# Altium PCB PCB1.PcbDoc
Units mil, origin at the board's own origin, x right, y up, seen from the top; angles counter-clockwise.
Board outline 6000 x 4000 mil, 2 copper layers (Top Layer, Bottom Layer); 10 components, 8 nets, 39 pads, 12 vias.
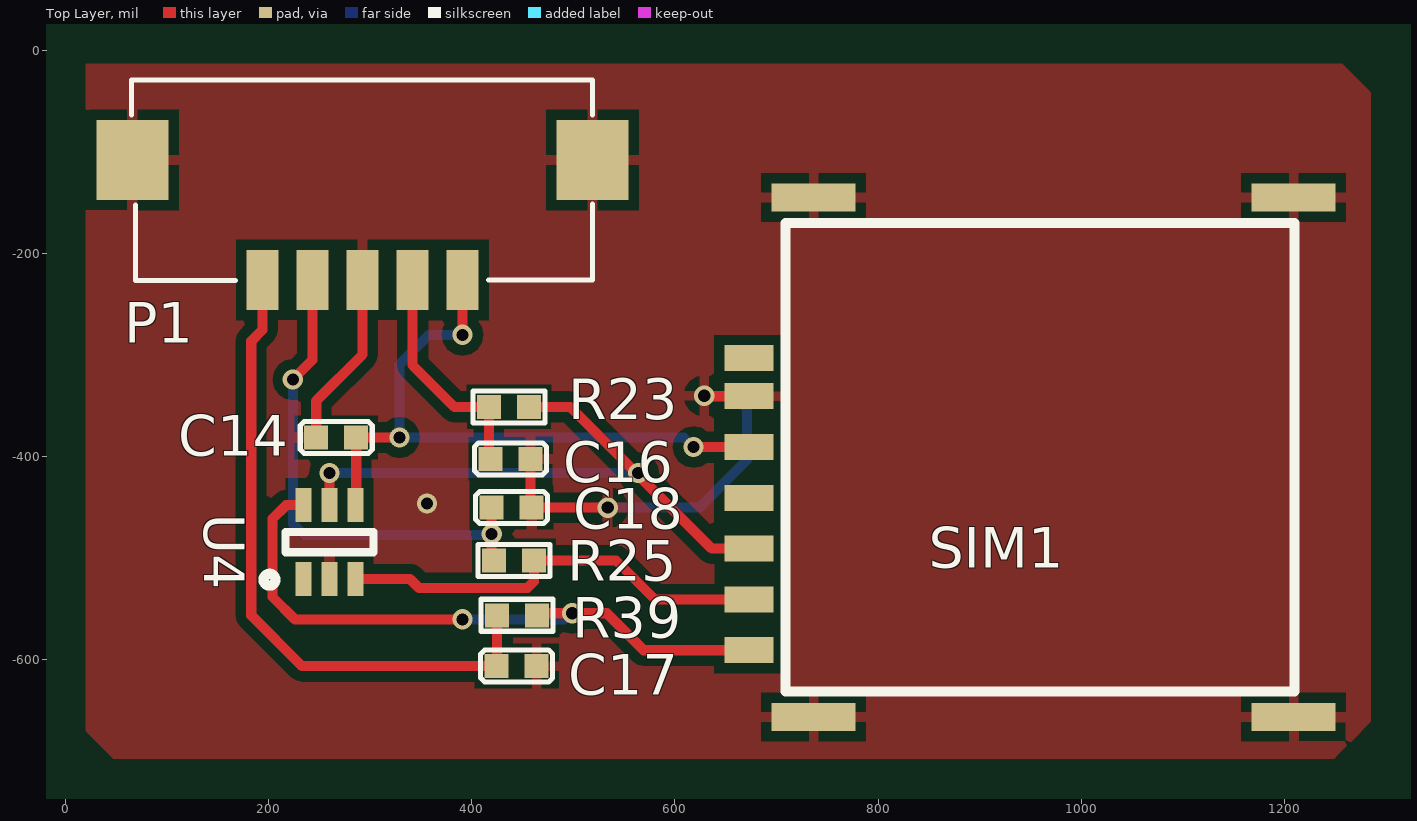
[diagram p0: Top Layer view]
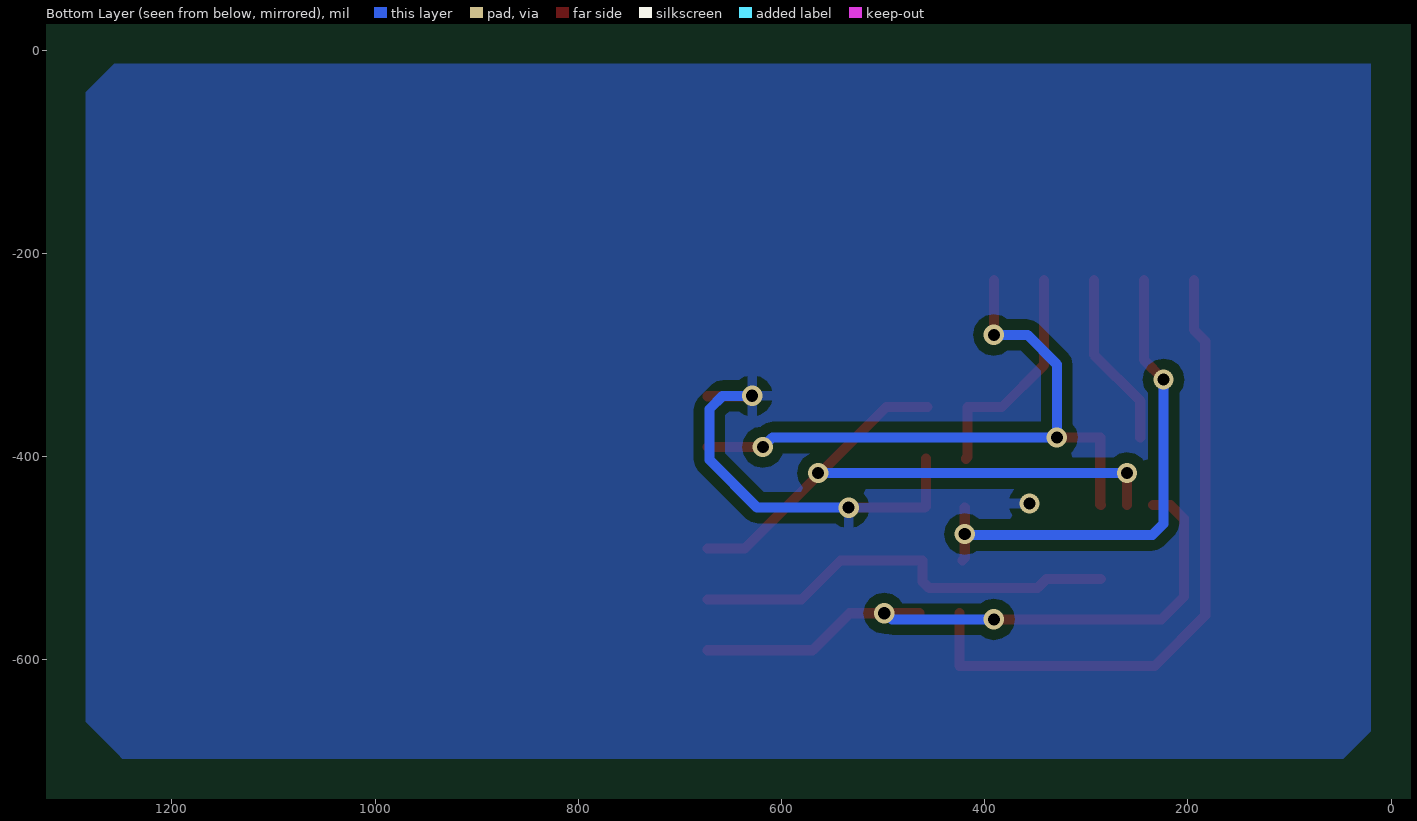
[diagram p1: Bottom Layer view, seen from below]

## Layer stack, top to bottom
Top Layer: signal copper 1.4
Dielectric: dielectric 12.6, FR-4, Dk 4.8
Bottom Layer: signal copper 1.4

## Board outline
-2327,-2683 3673,-2683 3673,1317 -2327,1317

## Design rules (kind name [scope] priority, off if disabled: settings)
Clearance [All] p1: gap=10
PolygonConnect [All] p1: connectstyle=Relief reliefconductorwidth=10 reliefentries=4 polygonreliefangle="90 Angle"
RoutingVias [All] p1: holewidth=28 width=50 viastyle="Through Hole" minholewidth=28 minwidth=50 maxholewidth=28 maxwidth=50
SilkscreenOverComponentPads [All] p1: minsilkscreentomaskgap=10
SolderMaskExpansion [All] p1: expansion=4
Width [All] p1: maxlimit=10 minlimit=10 preferedwidth=10
27 further rules are at their usual default settings.

## Components (designator, comment, footprint, x,y, rotation, side; value= is the part's Value field where it differs from the comment)
C14 "0.1uF" 0402C 247,-381 r0 top
C16 "10pF/NC" 0402C 458,-402 r180 top
C17 "10pF/NC" 0402C 464,-606 r180 top
C18 "10pF/NC" 0402C 459,-450 r180 top
P1 "Header 5" 5×1.25mmSMT 391,-226 r180 top
R23 "10R" 0402R 417,-351 r0 top
R25 "10R" 0402R 422,-502 r0 top
R39 "10R" 0402R 425,-556 r0 top
SIM1 "microsim" "Nano SIM" 673,-303 r90 top
U4 "SMF05C_1" SC70-6L 260,-484 r90 top

## Footprints (in the part's own frame and the unit in brackets; to place one, negate y for a bottom-side part, rotate by r counter-clockwise, add the part's x,y. Pads: shape width x height; smd on the part's side, far side on the other; paste and mask are expansions set on the pad)
5×1.25mmSMT [mm]
  rect 1.8x2 smd: 0(-3.25,-3) 0(8.25,-3)
  rect 0.8x1.5 smd: 1(0,0) 2(1.25,0) 3(2.5,0) 4(3.75,0) 5(5,0)
  round 0.5 on Top Overlay: ""(-0.875,0.432)
  silkscreen extent -3.25,-5 8.28,0.02
0402C [mm]
  rect 0.6x0.6 smd: 1(0,0) 2(1,0)
  silkscreen extent -0.4,-0.4 1.4,0.4
0402R [mm]
  rect 0.6x0.6 smd: 1(0,0) 2(1,0)
  silkscreen extent -0.4,-0.4 1.4,0.4
"Nano SIM" [mm]
  rect 0.7x2.1 smd: 0(-8.97,-1.615) 0(-8.97,-13.615) 0(4.02,-1.615) 0(4.02,-13.615)
  rect 0.65x1.23 smd: 1(-2.22,0) 2(-4.76,0) 3(-7.3,0) 5(-0.95,0) 6(-3.49,0) 7(-6.03,0) 8(0,0)
  silkscreen extent -8.33,-13.64 3.38,-0.91
SC70-6L [mm]
  rect 0.85x0.4 smd: 1(-0.925,0.65) 2(-0.925,0) 3(-0.925,-0.65) 4(0.925,-0.65) 5(0.925,0) 6(0.925,0.65)
  silkscreen extent -1.09,-1.1 0.25,1.65

## Part data
C14 C16 C17 C18: library part CAP, "Capacitor"
P1: "Header, 5-Pin"
R23 R25 R39: library part RES1
U4: "TVS"

## Via types
v1: diameter 20, hole 12, Top Layer to Bottom Layer, tented both sides, 12 vias

## Nets (pads, with @x,y where several pads share a name; then routed paths per layer and width w, separated by ;. In a path a pad name is that pad's centre, name@x,y a point inside that pad or via, vN(x,y) a via of type N, cw(c..) or ccw(c..) an arc to the next point about the centre after c; other vN are vias at no path point)
GND: C14.1 C16.1 C17.1 C18.1 P1.0 P1.3 SIM1.0 SIM1.5 U4.2 | length 595.3
  Top Layer w10: C14.1 247,-345 292.57,-299.43 P1.3 ; C16.1 458,-449 C18.1 v1(534,-450) ; v1(629,-340) 629.4,-340.4 SIM1.5
  Bottom Layer w10: v1(534,-450) 624,-450 671,-403 671,-353 658,-340 v1(629,-340)
  other v1: 356,-446
NetR23_2: R23.2 SIM1.2 U4.5 | length 610
  Top Layer w10: U4.5 v1(260,-416) ; R23.2 462,-351 497,-351 636.4,-490.4 SIM1.2
  Bottom Layer w10: v1(260,-416) v1(564,-416)
NetR25_2: R25.2 SIM1.7 U4.3 | length 430.1
  Top Layer w10: U4.3 339.42,-520.42 348,-529 455,-529 461.37,-522.63 R25.2 542,-502 580.4,-540.4 SIM1.7
NetR39_2: R39.2 SIM1.3 U4.6 | length 641.3
  Top Layer w10: U4.6 217.42,-447.58 204,-461 204,-538 226,-560 v1(391,-560) ; R39.2@464.37,-554 v1(499,-554) 533,-554 569.4,-590.4 SIM1.3
  Bottom Layer w10: v1(391,-560) 491,-560 v1@497,-554
SIM_CLK: C17.2 P1.5 R39.1 | length 649.1
  Top Layer w10: P1.5 194.15,-275 183,-286.15 183,-556 233,-606 C17.2 425,-605.63 R39.1@425,-554
SIM_DATA: C18.2 P1.4 R25.1 | length 501.2
  Top Layer w10: v1(224,-324) 243.36,-304.64 P1.4 ; C18.2 419.63,-499.63 R25.1
  Bottom Layer w10: v1(224,-324) 224,-466 235,-477 v1@419.63,-477
  other v1: 419.63,-476
SIM_RST: C16.2 P1.2 R23.1 | length 227.7
  Top Layer w10: P1.2 341.79,-309.79 383,-351 R23.1 417,-400.37 C16.2
SIM_VDD: C14.2 P1.1 SIM1.1 U4.4 | length 657.4
  Top Layer w10: U4.4 286.37,-446.8 C14.2 v1(329,-381) ; v1(391,-280) P1.1 ; v1(618.4,-390.4) SIM1.1
  Bottom Layer w10: v1(391,-280) 358,-280 329,-309 v1(329,-381) 609,-381 v1(618.4,-390.4)
pads on no net: P1. SIM1.6 SIM1.8 U4.1

## Polygon pours and split planes (outlines as drawn)
GND on Top Layer "Mid-Layer 1-No Net" (solid, remove dead copper): 20,-13 1257,-13 1283,-39 1285,-41 1285,-90 1285,-661 1253,-693 1249,-697 307,-697 47,-697 25,-675 20,-670 20,-13
GND on Bottom Layer "Mid-Layer 1-No Net" (solid, remove dead copper): 20,-13 1257,-13 1283,-39 1285,-41 1285,-90 1285,-661 1253,-693 1249,-697 307,-697 47,-697 25,-675 20,-670 20,-13

## Silkscreen, mask and mechanical layers (free items; w line width, h text height)
Mechanical 1:
  lines w5: 0,-708.66 0,0 1299.21,0 1299.21,-708.66 0,-708.66